# EAGLE board Speaker_System_Board (EAGLE 8.3.2)
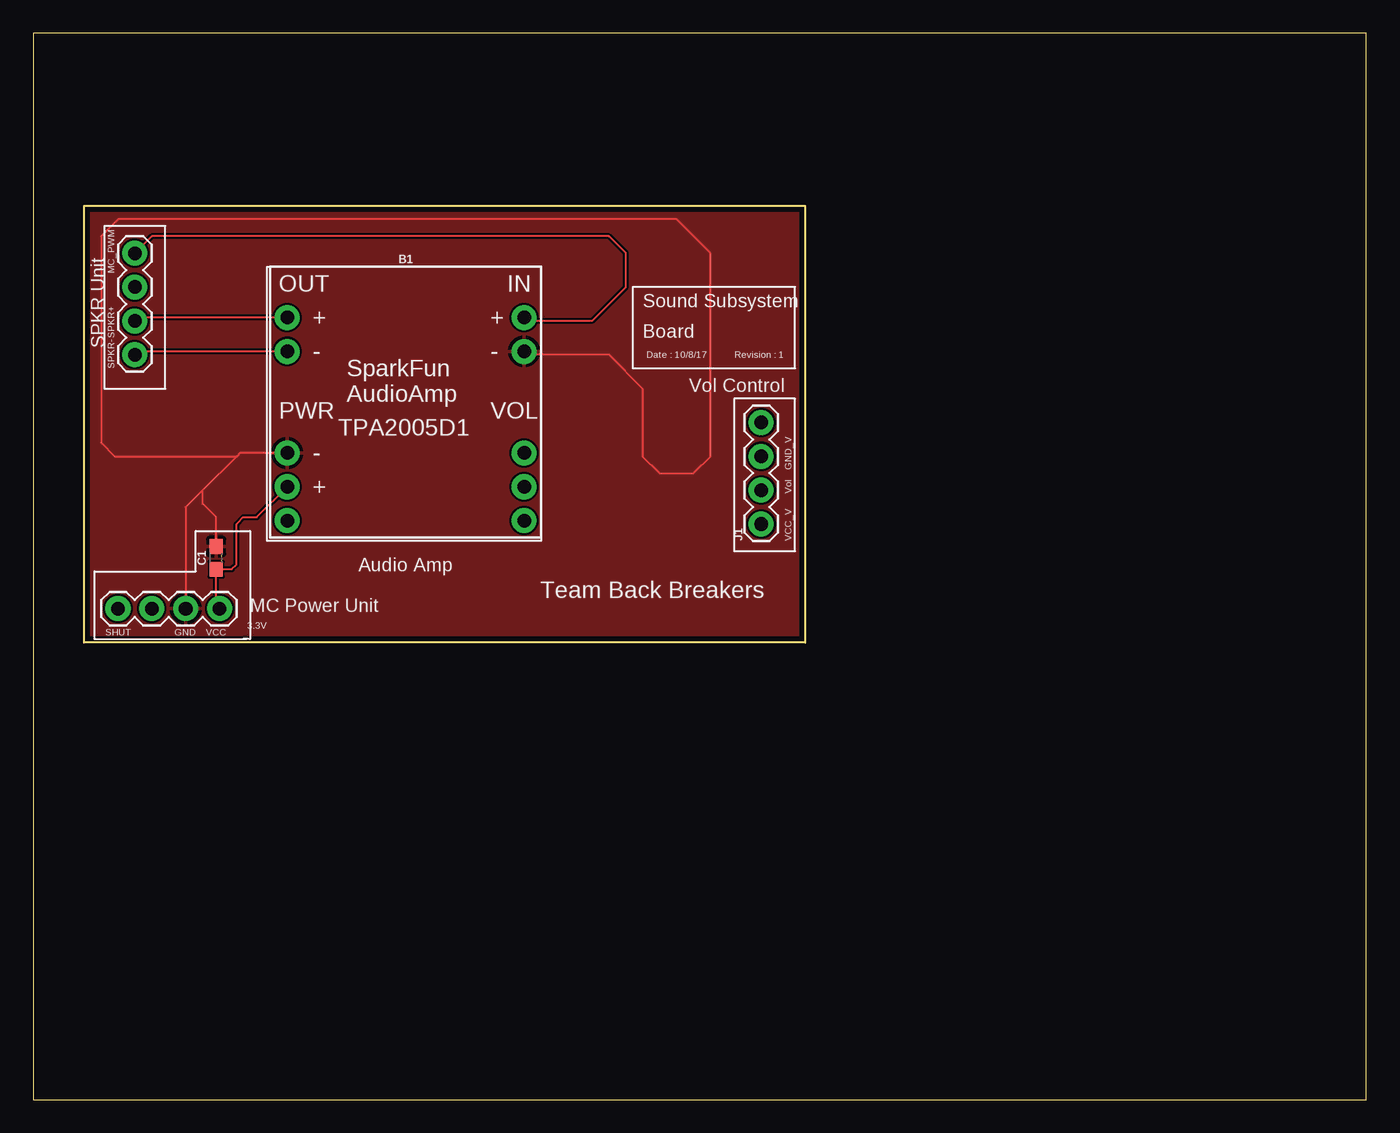
[diagram p0: board, top side]
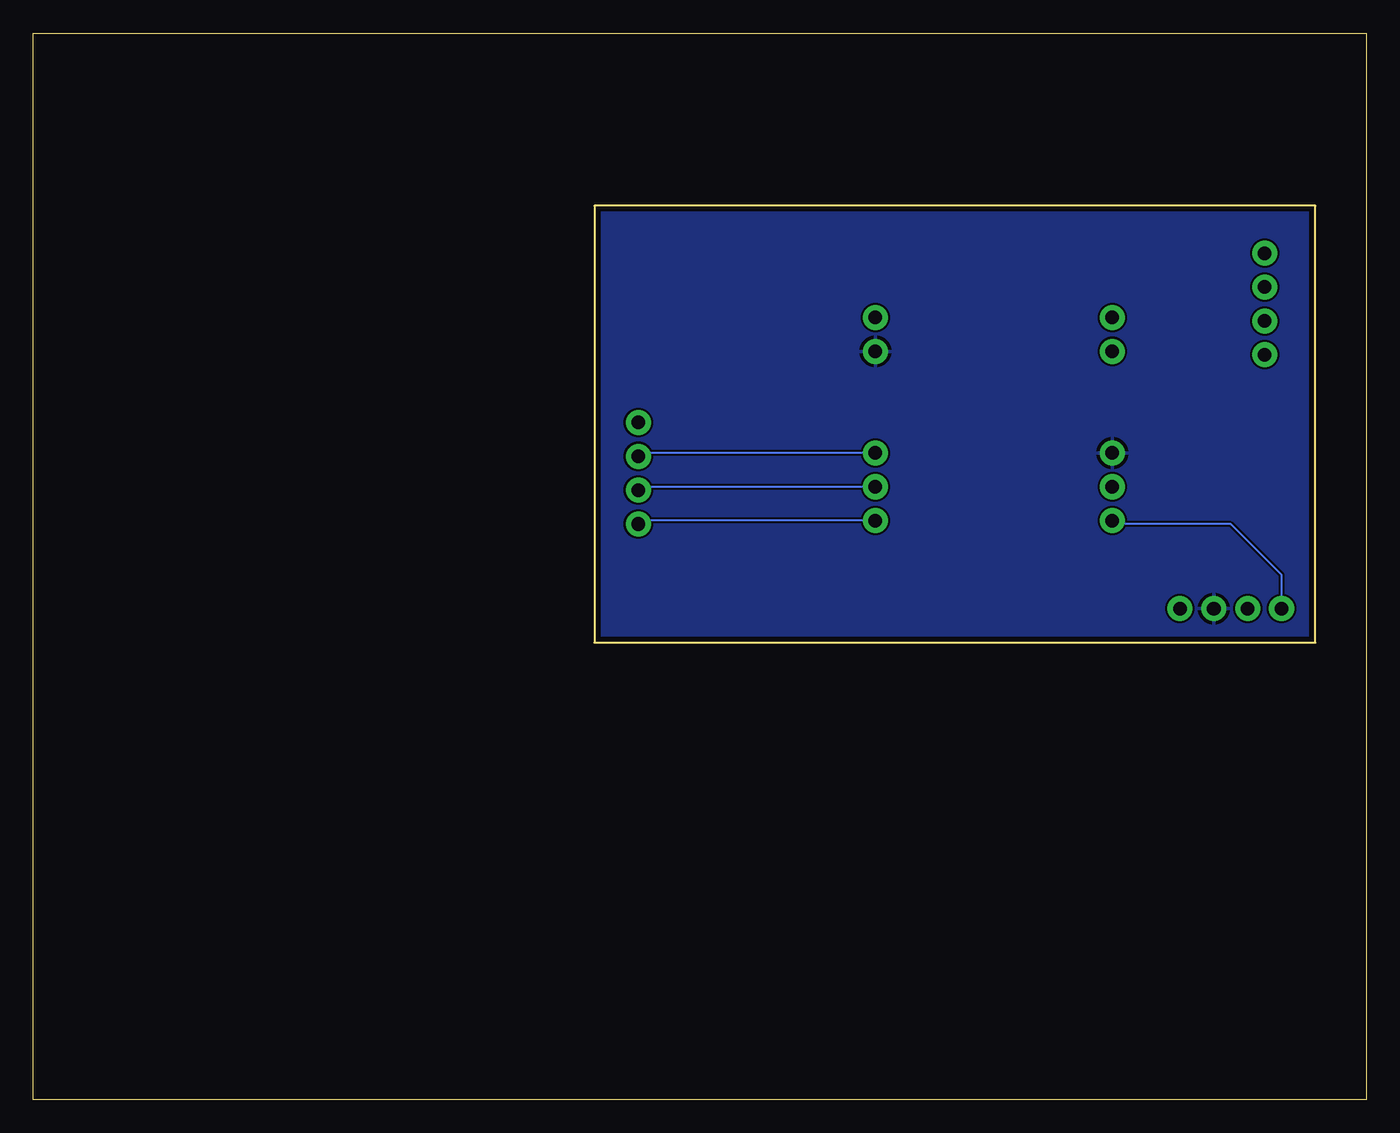
[diagram p1: board, bottom side, seen from below]

Size 100 x 80 mm. Coordinates in mm from the lower left corner, seen from the top.
Outline: 0,0 100,0 100,80 0,80 0,0
Outline: 3.81,67.06 57.91,67.06 57.91,34.29 3.81,34.29 3.81,67.06
Copper layers (1*16): Top 0.0356mm / dielectric 1.5011mm / Bottom 0.0356mm
Design rules "oshpark-2layer": minimum track width 6mil, minimum drill 13mil, track to track 6mil, track to pad 6mil, pad to pad 6mil, via to via 6mil, smd to smd 6mil, copper to edge 15mil, drill to drill 6mil, minimum pad ring 7mil, minimum via ring 7mil, stop-mask expansion 2.5mil, vias tented up to drill 0mil, thermal gap 10mil

## Footprints (pad centres in the part's own frame; a part is rotated, then mirrored left to right if it is on the bottom)
AUDIO-AMP-MONO = drill 1.016 pad 1.88: IN+ 8.89,6.35; IN- 8.89,3.81; OUT+ -8.89,6.35; OUT- -8.89,3.81; PWR+ -8.89,-6.35; PWR- -8.89,-3.81; S -8.89,-8.89; VOL 8.89,-6.35; VOL+ 8.89,-8.89; VOL- 8.89,-3.81
0603 = smd 1.1 x 1: 1 -0.85,0; 2 0.85,0
1X04 = drill 1.016 pad 1.88: 1 0,0; 2 2.54,0; 3 5.08,0; 4 7.62,0

## Placement (x,y rotation side)
B1  SPARKFUN_AUDIO-AMP-MONODIP  [AUDIO-AMP-MONO]  27.94,52.32 0 top
C1  0.1uF  [0603]  13.72,40.64 90 top
J1  [1X04]  54.61,43.18 90 top
J2  [1X04]  7.62,55.88 90 top
J3  [1X04]  6.35,36.83 0 top

## Library data of the parts
B1 = SparkFun-Boards
C1 = SparkFun-Capacitors; PROD_ID: CAP-00810
J1-J3 = SparkFun-Connectors; PROD_ID: CONN-09696

## Nets
GND: B1.IN- B1.PWR- C1.2 J3.3
GND_VOL: B1.VOL- J1.3
MC_PWM: B1.IN+ J2.4
SHTDOWN: B1.S J3.1
SPKR_OUT+: B1.OUT+ J2.2
SPKR_OUT-: B1.OUT- J2.1
VCC: B1.PWR+ C1.1 J3.4
VCC_VOL: B1.VOL+ J1.1
VOL: B1.VOL J1.2

## Tracks (layer width: path | path; a pad name or v marks a point on that pad's centre or on a via)
GND
  Top 0.152: 15.24,48.26 12.7,45.72 | 12.7,45.72 11.43,44.45 J3.3 | 15.24,48.26 6.1,48.26 5.08,49.28 5.08,64.77 6.35,66.04 48.26,66.04 50.8,63.5 50.8,48.26 49.53,46.99 46.99,46.99 45.72,48.26 45.72,53.34 43.18,55.88 37.08,55.88 B1.IN- | C1.2 13.72,43.69 12.7,44.7 12.7,45.72 | B1.PWR- 15.49,48.51 15.24,48.26
  pour Top: 3.81,67.06 57.91,67.06 57.91,34.29 3.81,34.29
  pour Bottom: 3.81,67.06 57.91,67.06 57.91,34.29 3.81,34.29
GND_VOL
  Bottom 0.152: B1.VOL- 54.36,48.51 J1.3
MC_PWM
  Top 0.152: J2.4 8.89,64.77 43.18,64.77 44.45,63.5 44.45,60.96 41.91,58.42 37.08,58.42 B1.IN+
SHTDOWN
  Bottom 0.152: J3.1 6.35,39.37 10.16,43.18 18.8,43.18 B1.S
SPKR_OUT+
  Top 0.152: B1.OUT+ 7.87,58.67 J2.2
SPKR_OUT-
  Top 0.152: B1.OUT- 7.87,56.13 J2.1
VCC
  Top 0.152: J3.4 13.72,37.08 C1.1 14.9,39.79 15.24,40.13 15.24,43.18 15.75,43.69 16.76,43.69 B1.PWR+
VCC_VOL
  Bottom 0.152: B1.VOL+ 54.36,43.43 J1.1
VOL
  Bottom 0.152: B1.VOL 54.36,45.97 J1.2

## Text on the board
tPlace: Sound Subsystem | SPKR+ | Board | SPKR Unit | Date : 10/8/17 | Revision : 1 | SPKR- | Vol Control | GND_V | Vol | VCC_V | Audio Amp | Team Back Breakers | MC Power Unit | 3.3V | SHUT | GND | VCC
tNames: MC_PWM